# EAGLE board Pendant (EAGLE 9.6.2)
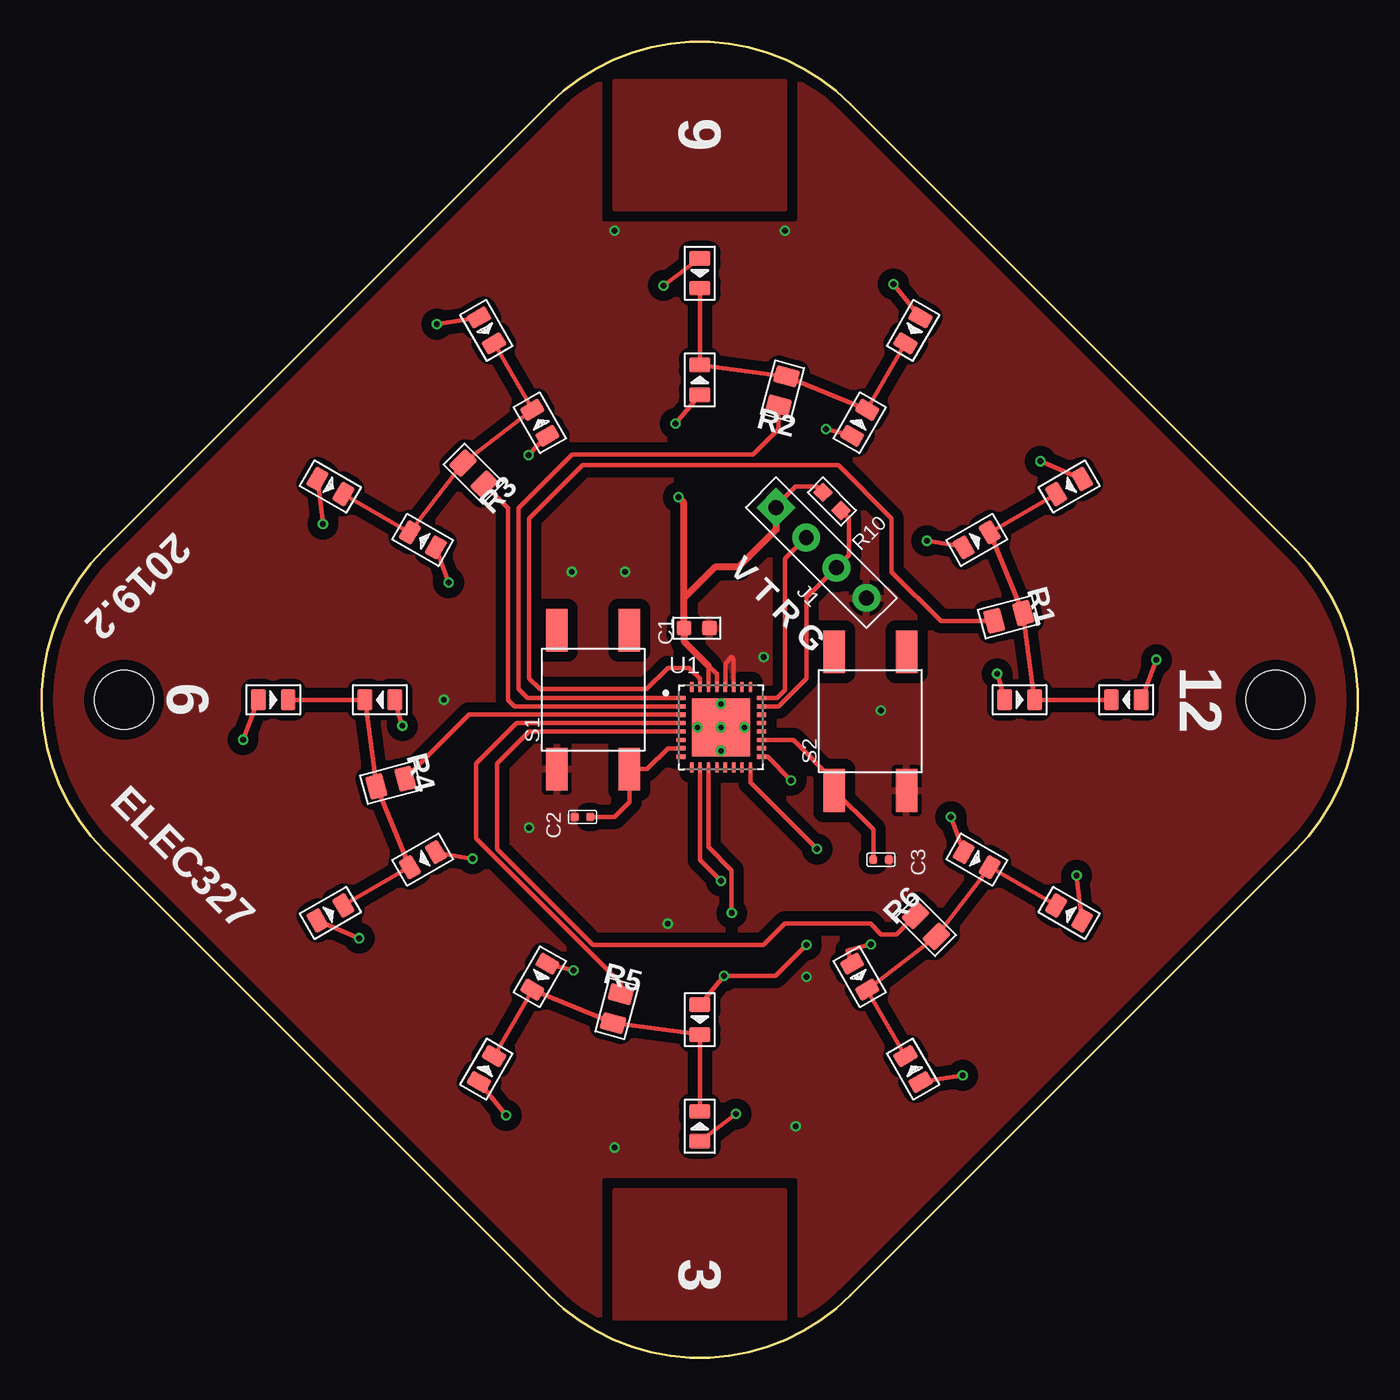
[diagram p0: board, top side]
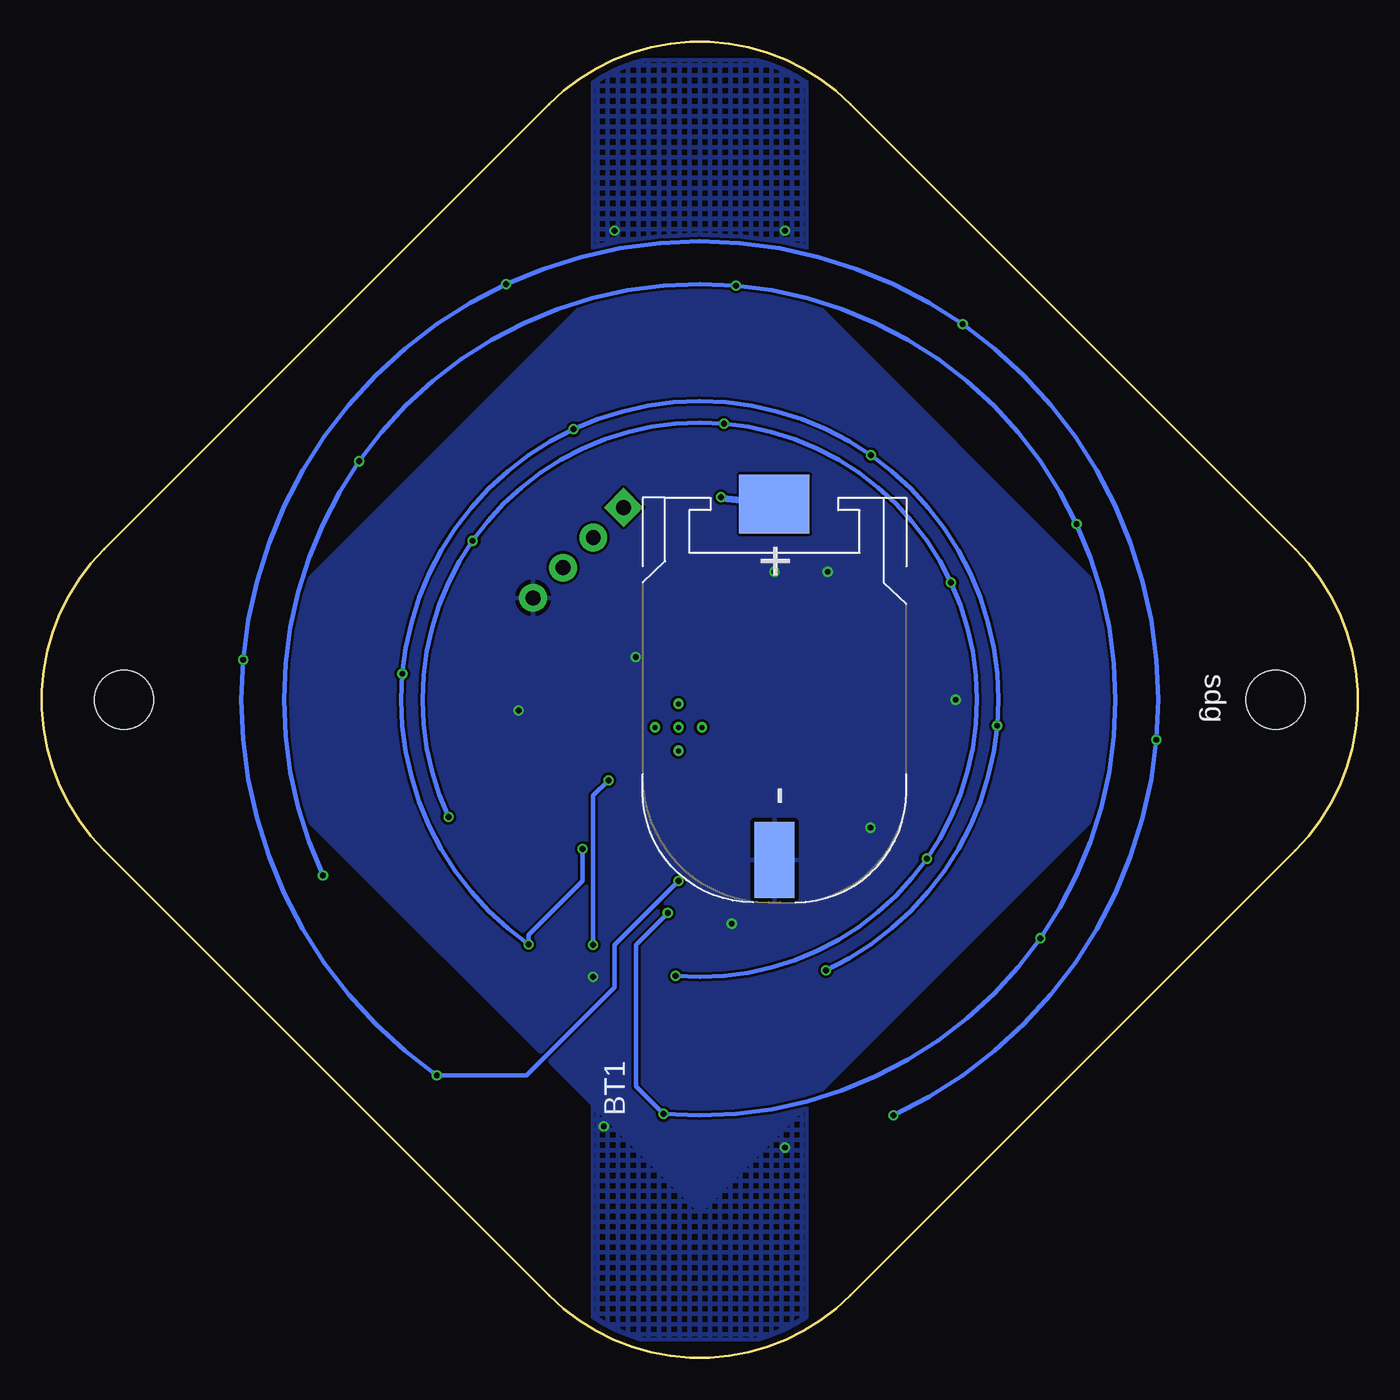
[diagram p1: board, bottom side, seen from below]

Size 78.35 x 78.35 mm. Coordinates in mm from the lower left corner, seen from the top.
Outline: 74.65,30.2 48.16,3.71 arc-90 30.2,3.71 3.71,30.2 arc-90 3.71,48.16 30.2,74.65 arc-90 48.16,74.65 74.65,48.16 arc-90 74.65,30.2
Copper layers (1*16): Top 0.035559375mm / dielectric 1.6mm / Bottom 0.035559375mm
Design rules "oshpark-2layer": minimum track width 6mil, minimum drill 10mil, track to track 6mil, track to pad 6mil, pad to pad 6mil, via to via 6mil, smd to smd 6mil, copper to edge 15mil, drill to drill 6mil, minimum pad ring 5mil, minimum via ring 5mil, stop-mask expansion 2.5mil, vias tented up to drill 0mil, thermal gap 10mil
Holes 3.5 mm at 73.47,39.18 4.89,39.18

## Footprints (pad centres in the part's own frame; a part is rotated, then mirrored left to right if it is on the bottom)
BAT_BLP2032SM-GTR = smd 3.5 x 4.2: + 23.725,0 | smd 4.5 x 2.4: - 2.525,0
C0603 = smd 0.889 x 0.889: 1 0,0.762; 2 0,-0.762
C0402 = smd 0.5 x 0.5: 1 0,0.463; 2 0,-0.463
H4-2.54 = drill 0.889 pad 1.651 square: 1 0,3.81 | drill 0.889 pad 1.651: 2 0,1.27; 3 0,-1.27; 4 0,-3.81
LED-0805 = smd 0.889 x 1.27: + -0.889,0; - 0.889,0
LSP10 = drill 0.35 pad 0.61: MP 0,0
R0805 = smd 1.397 x 1.016: 1 0,0.889; 2 0,-0.889
R0603 = smd 0.889 x 0.889: 1 0,0.762; 2 0,-0.762
SW4-SMD-6.0X6.0X5.0MM = smd 2.54 x 1.27: 1 -4.129,2.159; 2 -4.129,-2.159; 3 4.129,-2.159; 4 4.129,2.159
IC_MSP430G2553IRHB32R = smd 0.6 x 0.25: 1 -2.4,1.75; 2 -2.4,1.25; 3 -2.4,0.75; 4 -2.4,0.25; 5 -2.4,-0.25; 6 -2.4,-0.75; 7 -2.4,-1.25; 8 -2.4,-1.75; 17 2.4,-1.75; 18 2.4,-1.25; 19 2.4,-0.75; 20 2.4,-0.25; 21 2.4,0.25; 22 2.4,0.75; 23 2.4,1.25; 24 2.4,1.75 | smd 0.25 x 0.6: 9 -1.75,-2.4; 10 -1.25,-2.4; 11 -0.75,-2.4; 12 -0.25,-2.4; 13 0.25,-2.4; 14 0.75,-2.4; 15 1.25,-2.4; 16 1.75,-2.4; 25 1.75,2.4; 26 1.25,2.4; 27 0.75,2.4; 28 0.25,2.4; 29 -0.25,2.4; 30 -0.75,2.4; 31 -1.25,2.4; 32 -1.75,2.4 | smd 3.45 x 3.45: 33 0,0 | drill 0.3 pad 0.61: 34 0,0; 35 0,1.397; 36 -1.397,0; 37 0,-1.397; 38 1.397,0

## Placement (x,y rotation side)
BT1  BLP2032SM-GTR  [BAT_BLP2032SM-GTR]  34.73,27.11 90 bottom
C1  10UF 6.3V  [C0603]  39,43.44 90 top
C2  220NF  [C0402]  32.19,32.19 90 top
C3  220NF  [C0402]  49.97,29.65 270 top
J1  4p-2.54  [H4-2.54]  46.41,47.94 45 top
LED1  GREEN-0805  [LED-0805]  64.58,39.18 180 top
LED2  GREEN-0805  [LED-0805]  51.88,61.17 240 top
LED3  GREEN-0805  [LED-0805]  26.48,61.17 300 top
LED4  GREEN-0805  [LED-0805]  13.78,39.18 0 top
LED5  GREEN-0805  [LED-0805]  26.48,17.18 60 top
LED6  GREEN-0805  [LED-0805]  51.88,17.18 120 top
LED7  GREEN-0805  [LED-0805]  61.17,51.88 210 top
LED8  GREEN-0805  [LED-0805]  39.18,64.58 270 top
LED9  GREEN-0805  [LED-0805]  17.18,51.88 330 top
LED10  GREEN-0805  [LED-0805]  17.18,26.48 30 top
LED11  GREEN-0805  [LED-0805]  39.18,13.78 90 top
LED12  GREEN-0805  [LED-0805]  61.17,26.48 150 top
LED13  GREEN-0805  [LED-0805]  58.23,39.18 0 top
LED14  GREEN-0805  [LED-0805]  48.7,55.67 60 top
LED15  GREEN-0805  [LED-0805]  29.65,55.67 120 top
LED16  GREEN-0805  [LED-0805]  20.13,39.18 180 top
LED17  GREEN-0805  [LED-0805]  29.65,22.68 240 top
LED18  GREEN-0805  [LED-0805]  48.7,22.68 300 top
LED19  GREEN-0805  [LED-0805]  55.67,48.7 30 top
LED20  GREEN-0805  [LED-0805]  39.18,58.23 90 top
LED21  GREEN-0805  [LED-0805]  22.68,48.7 150 top
LED22  GREEN-0805  [LED-0805]  22.68,29.65 210 top
LED23  GREEN-0805  [LED-0805]  39.18,20.13 270 top
LED24  GREEN-0805  [LED-0805]  55.67,29.65 330 top
LSP1  LSP10  [LSP10]  66.38,41.56 5 top
LSP2  LSP10  [LSP10]  50.72,63.92 65 top
LSP3  LSP10  [LSP10]  23.51,61.54 125 top
LSP4  LSP10  [LSP10]  11.97,36.8 185 top
LSP5  LSP10  [LSP10]  27.64,14.43 245 top
LSP6  LSP10  [LSP10]  54.84,16.81 305 top
LSP7  LSP10  [LSP10]  59.46,53.38 35 top
LSP8  LSP10  [LSP10]  37.02,63.85 95 top
LSP9  LSP10  [LSP10]  16.73,49.64 155 top
LSP10  LSP10  [LSP10]  18.89,24.97 215 top
LSP11  LSP10  [LSP10]  41.33,14.51 275 top
LSP12  LSP10  [LSP10]  61.62,28.71 335 top
LSP13  LSP10  [LSP10]  56.89,40.73 5 top
LSP14  LSP10  [LSP10]  46.69,55.29 65 top
LSP15  LSP10  [LSP10]  28.98,53.74 125 top
LSP16  LSP10  [LSP10]  21.46,37.63 185 top
LSP17  LSP10  [LSP10]  31.66,23.06 245 top
LSP18  LSP10  [LSP10]  49.37,24.61 305 top
LSP19  LSP10  [LSP10]  52.7,48.65 35 top
LSP20  LSP10  [LSP10]  37.74,55.62 95 top
LSP21  LSP10  [LSP10]  24.21,46.15 155 top
LSP22  LSP10  [LSP10]  25.65,29.71 215 top
LSP23  LSP10  [LSP10]  40.61,22.73 275 top
LSP24  LSP10  [LSP10]  54.14,32.2 335 top
R1  330  [R0805]  57.58,44.11 105 top
R2  330  [R0805]  44.11,57.58 165 top
R3  330  [R0805]  25.71,52.65 225 top
R4  330  [R0805]  20.78,34.25 285 top
R5  330  [R0805]  34.25,20.78 345 top
R6  330  [R0805]  52.65,25.71 45 top
R10  47K  [R0603]  47.05,50.99 45 top
S1  [SW4-SMD-6.0X6.0X5.0MM]  32.83,39.18 90 top
S2  [SW4-SMD-6.0X6.0X5.0MM]  49.34,37.91 90 top
U1  MSP430G2553IRHB32R  [IC_MSP430G2553IRHB32R]  40.45,37.53 0 top

## Library data of the parts
BT1 = BLP2032SM-GTR; DESCRIPTION: Battery Holder (Open) Coin, 20.0mm 1 Cell SMD (SMT) Tab; DIGI-KEY_PART_NUMBER: BLP2032SM-GCT-ND; MF: MPD; MP: BLP2032SM-GTR; PACKAGE: Non-Standard MPD; PURCHASE-URL: https://pricing.snapeda.com/search/part/BLP2032SM-GTR/?ref=eda
C1 = OPL_Capacitor; MPN: CC0603MRX5R5BB106
C2 C3 = OPL_Capacitor; MPN: CC0402KRX7R7BB224
J1 = OPL_Connector; MPN: P125-1104A0BS116A1
LED1-LED24 = OPL_Optoelectronics; MPN: 17-215SYGC/S530-E2/TR8
LSP1-LSP24 = solpad-mod
R1-R6 = OPL_Resistor; MPN: RC0805JR-071KL; VALUE: 1K
R10 = OPL_Resistor; MPN: RC0603JR-0747KL
S1 S2 = OPL_Switch; MPN: DTSM-62K-S-V-T/R(SN431)
U1 = MSP430G2553IRHB32R; DESCRIPTION: 16 MHz MCU with 16KB FLASH, 512B SRAM, 10-bit ADC, Comparator, UART/SPI/I2C, Timer 32-VQFN -40 to 85; DIGI-KEY_PART_NUMBER: 296-28643-1-ND; MF: Texas Instruments; MP: MSP430G2553IRHB32R; PACKAGE: VQFN-32 Texas Instruments; PURCHASE-URL: https://pricing.snapeda.com/search/part/MSP430G2553IRHB32R/?ref=eda

## Nets
_RST: J1.3 R10.2 U1.23
CA1: LED1.- LED7.- LED13.- LED19.- R1.2
CA2: LED2.- LED8.- LED14.- LED20.- R2.2
CA3: LED3.- LED9.- LED15.- LED21.- R3.2
CA4: LED4.- LED10.- LED16.- LED22.- R4.2
CA5: LED5.- LED11.- LED17.- LED23.- R5.2
CA6: LED6.- LED12.- LED18.- LED24.- R6.2
CAP1: U1.26
CAP2: U1.25
CB1: LED1.+ LED2.+ LED3.+ LED4.+ LED5.+ LED6.+ LSP1.MP LSP2.MP LSP3.MP LSP4.MP LSP5.MP LSP6.MP U1.10
CB2: LED7.+ LED8.+ LED9.+ LED10.+ LED11.+ LED12.+ LSP7.MP LSP8.MP LSP9.MP LSP10.MP LSP11.MP LSP12.MP U1.11
CB3: LED13.+ LED14.+ LED15.+ LED16.+ LED17.+ LED18.+ LSP13.MP LSP14.MP LSP15.MP LSP16.MP LSP17.MP LSP18.MP U1.16
CB4: LED19.+ LED20.+ LED21.+ LED22.+ LED23.+ LED24.+ LSP19.MP LSP20.MP LSP21.MP LSP22.MP LSP23.MP LSP24.MP U1.17
GND: BT1.- C1.2 C2.1 C3.1 J1.4 S1.1 S2.2 U1.27 U1.28
N$2: R1.1 U1.31
N$6: U1.15
N$10: R2.1 U1.1
N$11: R3.1 U1.2
N$12: R4.1 U1.3
N$13: R5.1 U1.4
N$14: R6.1 U1.5
SWITCH1: C2.2 S1.2 U1.7
SWITCH2: C3.2 S2.1 U1.19
SWITCH3: U1.20
TEST: J1.2 U1.24
VDD: BT1.+ C1.1 J1.1 R10.1 U1.29 U1.30

## Tracks (layer width: path | path; a pad name or v marks a point on that pad's centre or on a via)
_RST
  Top 0.254: U1.23 43.86,38.78 45.53,40.45 45.53,45.25 J1.3 48.07,47.79 48.07,49.97 R10.2
CA1
  Top 0.254: LED7.- LED19.- R1.2 LED13.- LED1.-
CA2
  Top 0.254: LED8.- LED20.- R2.2 LED14.- LED2.-
CA3
  Top 0.254: LED9.- LED21.- R3.2 LED15.- LED3.-
CA4
  Top 0.254: LED4.- LED16.- R4.2 LED22.- LED10.-
CA5
  Top 0.254: LED11.- LED23.- R5.2 LED17.- LED5.-
CA6
  Top 0.254: LED12.- LED24.- R6.2 LED18.- LED6.-
CAP1
  pour Top (isolate 0.406, no thermals): 34.1,76.01 34.1,68.39 44.26,68.39 44.26,76.01
CAP2
  pour Top: 34.1,9.97 44.26,9.97 44.26,2.35 34.1,2.35
CB1  (via drill 0.35)
  Top 0.254: LED6.+ LSP6.MP | LED1.+ LSP1.MP | LED2.+ LSP2.MP | LED3.+ LSP3.MP | LED4.+ LSP4.MP | LED5.+ LSP5.MP | U1.10 39.2,29.63 v40.45,28.38
  Bottom 0.254: LSP5.MP arc-60 LSP4.MP arc-60 LSP3.MP arc-60 LSP2.MP arc-60 LSP1.MP arc-60 LSP6.MP 49.48,16.81 44.26,22.03 44.26,24.57 v40.45,28.38
CB2  (via drill 0.35)
  Top 0.254: LED12.+ LSP12.MP | LED7.+ LSP7.MP | LED8.+ LSP8.MP | LED9.+ LSP9.MP | LED10.+ LSP10.MP | LED11.+ LSP11.MP | U1.11 39.7,30.4 41.08,29.02 v41.08,26.48
  Bottom 0.254: LSP12.MP arc60 LSP7.MP arc60 LSP8.MP arc60 LSP9.MP arc60 LSP10.MP arc60 LSP11.MP 42.99,16.16 42.99,24.57 v41.08,26.48
CB3  (via drill 0.35)
  Top 0.254: LED18.+ 47.98,24.24 LSP18.MP | LED13.+ LSP13.MP | LED14.+ LSP14.MP | LED15.+ LSP15.MP | LED16.+ LSP16.MP | LED17.+ LSP17.MP | U1.16 42.2,34.25 v46.16,30.29
  Bottom 0.254: LSP17.MP arc-60 LSP16.MP arc-60 LSP15.MP arc-60 LSP14.MP arc-60 LSP13.MP arc-60 LSP18.MP 49.37,25.17 46.16,28.38 v46.16,30.29
CB4  (via drill 0.35)
  Top 0.254: LED24.+ LSP24.MP | LED19.+ LSP19.MP | LED20.+ LSP20.MP | LED21.+ LSP21.MP | LED22.+ LSP22.MP | LED23.+ LSP23.MP 43.68,22.73 v45.53,24.57 | U1.17 43.2,35.78 v44.61,34.38
  Bottom 0.254: LSP23.MP arc-60 LSP22.MP arc-60 LSP21.MP arc-60 LSP20.MP arc-60 LSP19.MP arc-60 LSP24.MP | v44.61,34.38 45.53,33.46 v45.53,24.57
GND  (via drill 0.35)
  Top 0.254: U1.28 40.7,41.33 41.08,41.72 41.2,41.6 U1.27
  other vias: 31.56,46.8 37.27,25.84 34.73,46.8 49.97,38.54 45.53,22.67 23.94,39.18 34.1,12.51 44.89,13.78 34.1,67.12 44.26,67.12 29.02,31.56 42.99,41.72
  pour Top (isolate 0.61, rank 2): -4,-4 -4,82.36 82.36,82.36 82.36,-4
  pour Bottom (rank 2): 8.7,39.18 39.18,8.7 69.66,39.18 39.18,69.66
  pour Bottom (hatched): 32.83,16.32 45.53,16.32 45.53,1.08 32.83,1.08
  pour Bottom (hatched): 32.83,77.28 32.83,62.04 45.53,62.04 45.53,77.28
N$2
  Top 0.254: R1.1 53.53,43.88 50.61,46.8 50.61,49.97 47.43,53.15 32.19,53.15 29.02,49.97 29.02,40.45 29.65,39.81 36,39.81 37.27,41.08 38.54,41.08 39.18,40.45 39.18,39.95 U1.31
N$10
  Top 0.254: R2.1 43.88,55.31 42.35,53.78 31.56,53.78 28.38,50.61 28.38,39.81 28.91,39.28 U1.1
N$11
  Top 0.254: R3.1 27.75,50.61 27.75,39.18 28.14,38.78 U1.2
N$12
  Top 0.254: R4.1 25.44,38.28 U1.3
N$13
  Top 0.254: R5.1 34.48,22.03 34.48,22.29 25.84,30.92 25.84,35.37 28.26,37.78 U1.4
N$14
  Top 0.254: U1.5 38.03,37.27 29.02,37.27 27.11,35.37 27.11,30.29 32.83,24.57 42.99,24.57 44.26,25.84 49.34,25.84 49.97,25.21 50.89,25.21 R6.1
SWITCH1
  Top 0.254: U1.7 37.27,36.28 36.03,35.05 S1.2 34.98,33.08 34.1,32.19 C2.2
SWITCH2
  Top 0.254: U1.19 44.74,36.78 47.18,34.35 S2.1 49.51,31.44 C3.2
TEST
  Top 0.254: U1.24 43.79,39.28 44.26,39.75 44.26,47.58 J1.2
VDD  (via drill 0.35)
  Top 0.254: U1.29 40.2,40.7 39.7,41.2 U1.30 | J1.1 43.72,50.71 44.89,51.88 46.16,51.88 R10.1
  Top 0.406: C1.1 38.27,43.67 38.27,42.62 39.7,41.2 | C1.1 38.23,45.22 40.08,47.07 41.48,47.07 43.72,49.31 J1.1 | v37.91,51.24 38.23,50.91 C1.1
  Bottom 0.406: BT1.+ 37.83,51.17 v37.91,51.24

## Text on the board
tPlace: 9 | 2019.2 | 6 | 12 | ELEC327 | 3
bPlace: sdg
tNames: V T R G